# Altium PCB AES50.PcbDoc
Units mm, origin at the board's own origin, x right, y up, seen from the top; angles counter-clockwise.
Board outline 52.07 x 142.24 mm, 2 copper layers (Top Layer, Bottom Layer); 56 components, 83 nets, 278 pads, 88 vias.
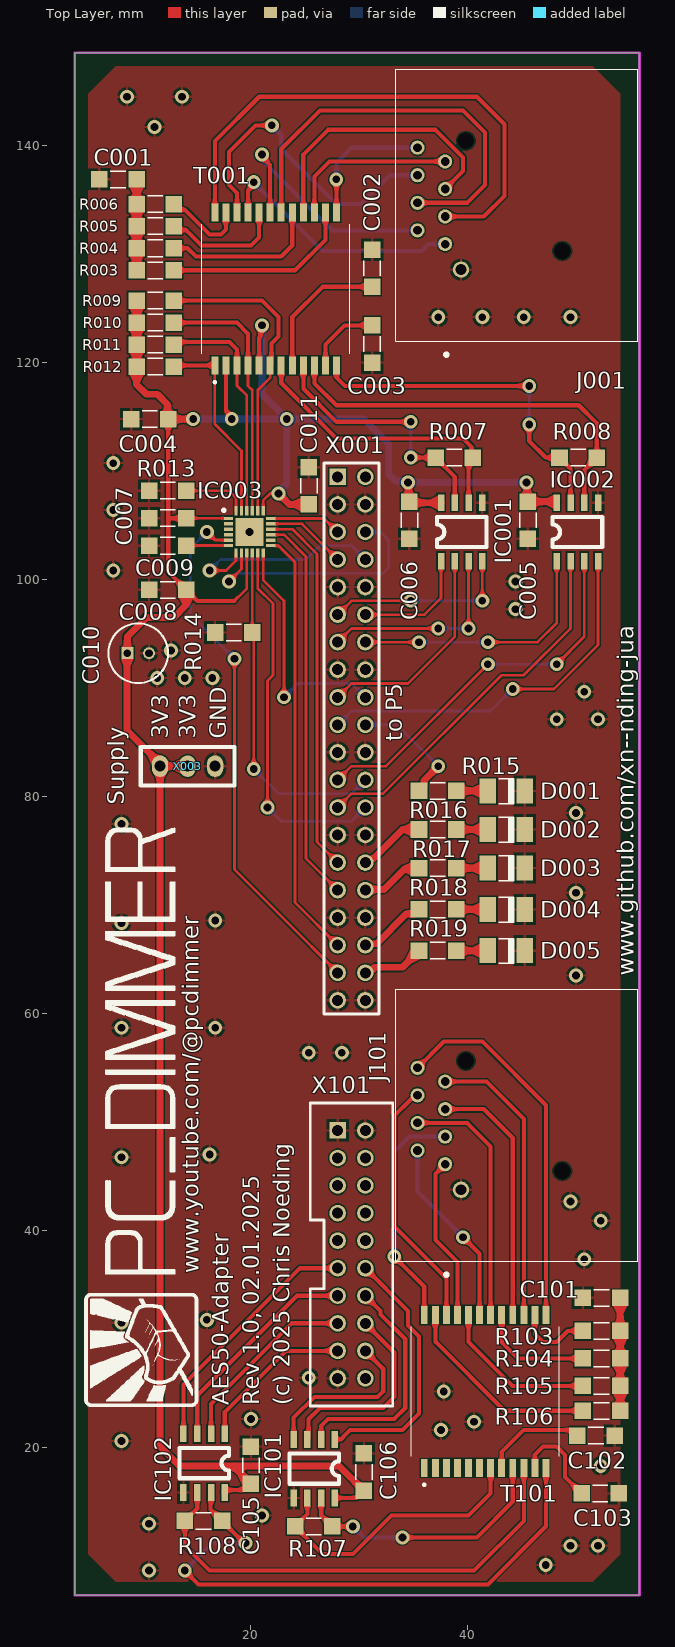
[diagram p0: Top Layer view]
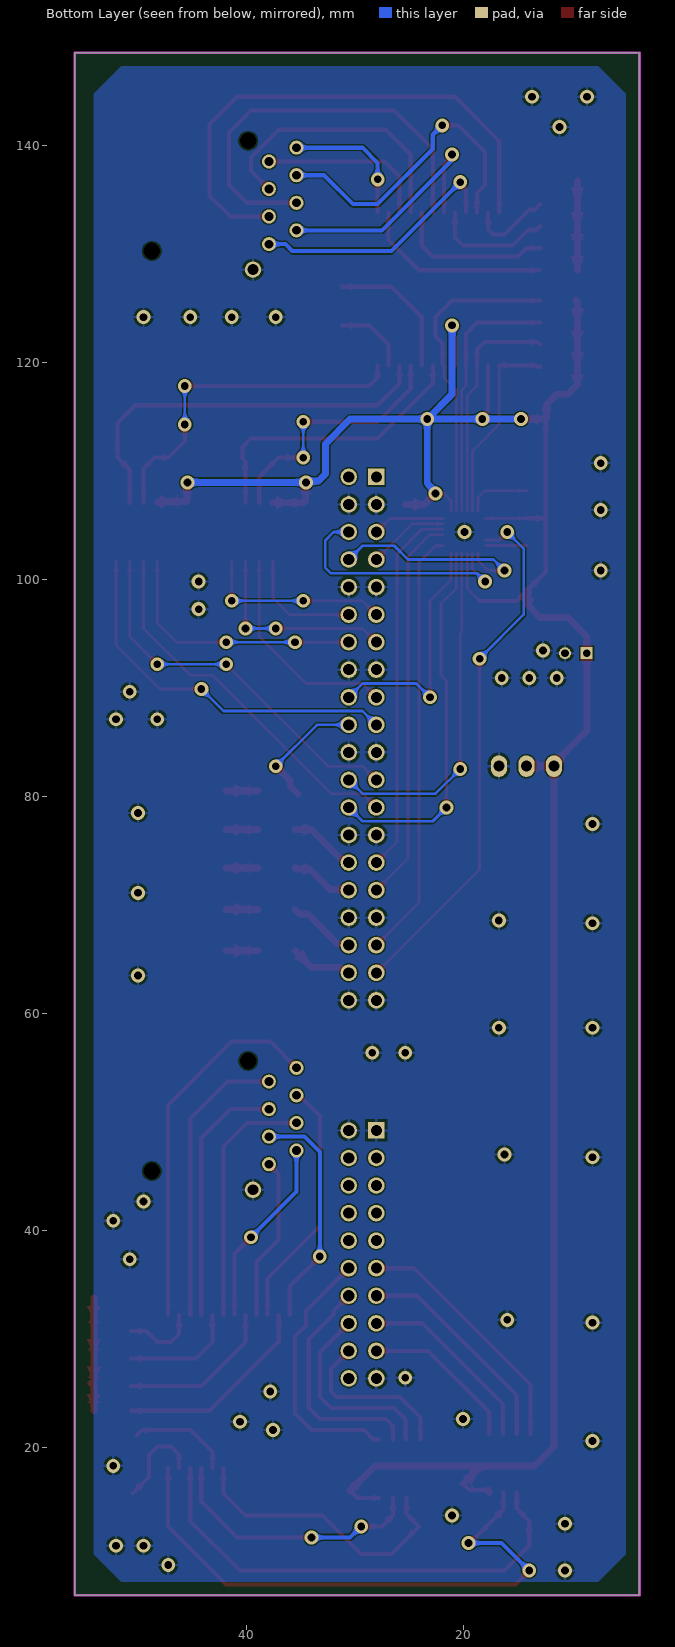
[diagram p1: Bottom Layer view, seen from below]

## Layer stack, top to bottom
Top Solder: solder mask 0.0102, Solder Resist, Dk 3.5
Top Layer: signal copper 0.0356
Dielectric 1: dielectric 0.32, FR-4, Dk 4.8
Bottom Layer: signal copper 0.0356
Bottom Solder: solder mask 0.0102, Solder Resist, Dk 3.5

## Board outline
3.81,6.35 3.81,148.59 55.88,148.59 55.88,6.35

## Design rules (kind name [scope] priority, off if disabled: settings)
Clearance [All] p1: gap=0.127 ignorepadtopadclearanceinfootprint=FALSE
PolygonConnect [All] p1: connectstyle=Relief reliefconductorwidth=0.254 reliefentries=4 polygonreliefangle="90 Angle" airgapwidth=0.254
RoutingVias [All] p1: holewidth=0.711 width=1.27 viastyle="Through Hole" minholewidth=0.711 minwidth=1.27 maxholewidth=0.711 maxwidth=1.27
SolderMaskExpansion [All] p1: expansion=0.102 istentingtop=FALSE
SupplyNets "Schematic Supply Nets_1" [InNet('GND')] p1: voltage=0.000
SupplyNets "Schematic Supply Nets" [InNet('3V3')] p2: voltage=0.000
Width [All] p1: maxlimit=1.27 minlimit=0.254 preferedwidth=0.254 minimp=50.000000 maximp=50.000000 favimp=50.000000
30 further rules are at their usual default settings.

## Classes and differential pairs
component class AES50B: C101 C102 C103 C105 C106 IC101 IC102 J101 R103 R104 R105 R106 R107 R108 T101 X101
component class AES50: C001 C002 C003 C004 C005 C006 C007 C008 C009 C010 C011 D001 D002 D003 D004 D005 IC001 IC002 IC003 J001 R003 R004 R005 R006 R007 R008 R009 R010 R011 R012 R013 R014 R015 R016 R017 R018 R019 T001 X001 X003

## Components (designator, comment, footprint, x,y, rotation, side; value= is the part's Value field where it differs from the comment)
C001 "1nF" 1206 9.525,136.906 r180 top
C002 "100nF" 1206 31.242,127 r90 top
C003 "100nF" 1206 31.242,123.444 r270 top
C004 "100nF" 1206 12.446,114.808 r180 top
C005 "100nF" 1206 45.593,107.188 r270 top
C006 "100nF" 1206 34.671,107.188 r270 top
C007 "100nF" 1206 14.097,105.664 r180 top
C008 "100nF" 1206 14.097,99.06 r180 top
C009 "1uF" 1206 14.097,103.124 r180 top
C010 "47µF/16V" CAPPRD200W50D550H1250 8.668,93.218 r0 top
C011 "100nF" 1206 25.4,106.934 r90 top
C101 "1nF" 1206 54.102,33.782 r180 top
C102 "100nF" 1206 50.165,21.082 r0 top
C103 "100nF" 1206 50.546,15.748 r0 top
C105 "100nF" 1206 20.066,16.637 r90 top
C106 "100nF" 1206 30.48,16.002 r90 top
D001 "LED 3MM" "LED 3MM" 45.31,82.018 r0 top
D002 "LED 3MM" "LED 3MM" 45.31,78.462 r0 top
D003 "LED 3MM" "LED 3MM" 45.31,74.906 r0 top
D004 "LED 3MM" "LED 3MM" 45.31,71.096 r0 top
D005 "LED 3MM" "LED 3MM" 45.31,67.286 r0 top
IC001 "65MLVD204" SOIC-8 39.497,104.394 r0 top
IC002 "65MLVD204" SOIC-8 50.165,104.394 r0 top
IC003 "LAN8720A" QFN50P400X400X100-25N-D 19.939,104.394 r0 top
IC101 "65MLVD204" SOIC-8 25.908,18.034 r180 top
IC102 "65MLVD204" SOIC-8 15.748,18.542 r180 top
J001 "NE8FAH-C5" NE8FAHC5 37.968,130.937 r270 top
J101 "NE8FAH-C5" NE8FAHC5 37.968,46.101 r270 top
R003 "75R" 1206 9.525,128.524 r0 top
R004 "75R" 1206 9.525,130.556 r0 top
R005 "75R" 1206 9.525,132.588 r0 top
R006 "75R" 1206 9.525,134.62 r0 top
R007 "100R" 1206 40.513,111.252 r180 top
R008 "100R" 1206 51.943,111.252 r180 top
R009 "49R9" 1206 12.954,125.73 r180 top
R010 "49R9" 1206 12.954,123.698 r180 top
R011 "49R9" 1206 12.954,121.666 r180 top
R012 "49R9" 1206 12.954,119.634 r180 top
R013 "12k1" 1206 10.668,108.204 r0 top
R014 "10k" 1206 16.76,95.127 r0 top
R015 "470R" 1206 38.989,80.518 r180 top
R016 "470R" 1206 38.989,76.962 r180 top
R017 "470R" 1206 38.989,73.406 r180 top
R018 "470R" 1206 38.989,69.596 r180 top
R019 "470R" 1206 38.989,65.786 r180 top
R103 "75R" 1206 54.102,30.734 r180 top
R104 "75R" 1206 54.102,28.194 r180 top
R105 "75R" 1206 54.102,25.654 r180 top
R106 "75R" 1206 54.102,23.368 r180 top
R107 "100R" 1206 24.13,12.7 r0 top
R108 "100R" 1206 13.97,13.208 r0 top
T001 "H2006ANLT" H2006ANLT 22.346,126.808 r0 top
T101 "H2006ANLT" H2006ANLT 41.656,25.146 r0 top
X001 "DIP40" DIP40 28.067,109.474 r0 top
X003 "1x3 Jumper" "1x3 Jumper" 14.224,82.804 r0 top
X101 "Steckerleiste_2x10" steckerleiste_2x10 30.607,49.214 r270 top

## Footprints (in the part's own frame and the unit in brackets; to place one, negate y for a bottom-side part, rotate by r counter-clockwise, add the part's x,y. Pads: shape width x height; smd on the part's side, far side on the other; paste and mask are expansions set on the pad)
"1x3 Jumper" [mm]
  oval 1.5x2 hole 1: 1(-2.54,0) 2(0,0) 3(2.54,0)
  silkscreen extent -4.32,-1.78 4.32,1.78
1206 [mil] "Standard 1206 Device"
  rect 60x60 smd: 1(0,0) 2(135,0)
  silkscreen extent 40,-30 95,30, body extent -15,-25 155,25, height 39
CAPPRD200W50D550H1250 [mm]
  rect 1.1x1.1 hole 0.7: 1(0,0)
  round 1.1 hole 0.7: 2(2,0)
  silkscreen extent -1.75,-2.75 3.75,2.75, body extent -1.74,-2.75 3.75,2.75, height 12.5
DIP40 [mil]
  rect 60x60 hole 40: 1(0,0)
  round 60 hole 40: 2(100,0) 3(0,-100) 4(100,-100) 5(0,-200) 6(100,-200) 7(0,-300) 8(100,-300) 9(0,-400) 10(100,-400) 11(0,-500) 12(100,-500) 13(0,-600) 14(100,-600) 15(0,-700) 16(100,-700) 17(0,-800) 18(100,-800) 19(0,-900) 20(100,-900) 21(0,-1000) 22(100,-1000) 23(0,-1100) 24(100,-1100) 25(0,-1200) 26(100,-1200) 27(0,-1300) 28(100,-1300) 29(0,-1400) 30(100,-1400) 31(0,-1500) 32(100,-1500) 33(0,-1600) 34(100,-1600) 35(0,-1700) 36(100,-1700) 37(0,-1800) 38(100,-1800) 39(0,-1900) 40(100,-1900)
  silkscreen extent -50,-1950 150,50
H2006ANLT [mm]
  rect 0.64x1.65 smd: 1(-5.61,-7.05) 2(-4.59,-7.05) 3(-3.57,-7.05) 4(-2.55,-7.05) 5(-1.53,-7.05) 6(-0.51,-7.05) 7(0.51,-7.05) 8(1.53,-7.05) 9(2.55,-7.05) 10(3.57,-7.05) 11(4.59,-7.05) 12(5.61,-7.05) 13(5.61,7.05) 14(4.59,7.05) 15(3.57,7.05) 16(2.55,7.05) 17(1.53,7.05) 18(0.51,7.05) 19(-0.51,7.05) 20(-1.53,7.05) 21(-2.55,7.05) 22(-3.57,7.05) 23(-4.59,7.05) 24(-5.61,7.05)
  silkscreen extent -6.82,-8.7 6.82,5.97
"LED 3MM" [mm]
  rect 1.524x2.3 smd: 1(-3.4,-1.5) 2(0,-1.5)
  silkscreen extent -2.41,-2.67 -1.02,-0.38, body extent -3.81,-2.54 0.51,-0.51, height 1
NE8FAHC5 [mm]
  round 1.3 hole 0.8: 1(0,0) 2(-1.27,-2.54) 3(-2.54,0) 4(-3.81,-2.54) 5(-5.08,0) 6(-6.35,-2.54) 7(-7.62,0) 8(-8.89,-2.54)
  round 1.5 hole 1: G1(2.355,1.47)
  round 0.775 hole 1.55 unplated: MH1(-9.525,1.91) MH2(0.635,10.8)
  silkscreen extent -16.13,-4.54 10.34,17.78, body extent -17.06,-5.64 8.03,21.51, height 31.21
QFN50P400X400X100-25N-D [mm]
  rect 0.85x0.3 smd: 1(-1.95,1.25) 2(-1.95,0.75) 3(-1.95,0.25) 4(-1.95,-0.25) 5(-1.95,-0.75) 6(-1.95,-1.25) 13(1.95,-1.25) 14(1.95,-0.75) 15(1.95,-0.25) 16(1.95,0.25) 17(1.95,0.75) 18(1.95,1.25)
  rect 0.3x0.85 smd: 7(-1.25,-1.95) 8(-0.75,-1.95) 9(-0.25,-1.95) 10(0.25,-1.95) 11(0.75,-1.95) 12(1.25,-1.95) 19(1.25,1.95) 20(0.75,1.95) 21(0.25,1.95) 22(-0.25,1.95) 23(-0.75,1.95) 24(-1.25,1.95)
  rect 2.6x2.6 smd: 25(0,0)
  silkscreen extent -2.5,1.88 -2.25,2.12, body extent -2.05,-2.05 2.05,2.05, height 1
SOIC-8 [mm]
  rect 0.6x1.55 smd: 1(-1.905,-2.7) 2(-0.635,-2.7) 3(0.635,-2.7) 4(1.905,-2.7) 5(1.905,2.7) 6(0.635,2.7) 7(-0.635,2.7) 8(-1.905,2.7)
  silkscreen extent -2.29,-1.4 2.29,1.4, body extent -2.45,-3.03 2.45,2.97, height 1.75
steckerleiste_2x10 [mil]
  rect 60x60 hole 40: 1(0,-100)
  round 60 hole 40: 2(0,0) 3(100,-100) 4(100,0) 5(200,-100) 6(200,0) 7(300,-100) 8(300,0) 9(400,-100) 10(400,0) 11(500,-100) 12(500,0) 13(600,-100) 14(600,0) 15(700,-100) 16(700,0) 17(800,-100) 18(800,0) 19(900,-100) 20(900,0)
  silkscreen extent -100,-200 1000,100, body extent -100,-200 1000,100, height 394

## Part data
C001 C002 C003 C004 C005 C006 C007 C008 C009 C011 C101 C102 C103 C105 C106: library part 1206_C_1nF/63V, "1206_C", Text Field1=06-23225
C010: library part MAL214256479E3, "Capacitor Polarised", Manufacturer_Name=Vishay, Datasheet Link=https://www.vishay.com/docs/28402/142rhs.pdf, Height=12.5mm, Manufacturer_Part_Number=MAL214256479E3
IC003: "Integrated Circuit", Manufacturer_Name=Microchip, Datasheet Link=http://ww1.microchip.com/downloads/en/DeviceDoc/8720a.pdf, Height=1mm, Manufacturer_Part_Number=LAN8720A
J001 J101: "Connector", Manufacturer_Name=Neutrik, Mouser Part Number=568-NE8FAH-C5, Datasheet Link=https://www.neutrik.com/media/10049/download/ne8fah-c5-1.pdf?v=1, Height=28.7mm, Manufacturer_Part_Number=NE8FAH-C5, Mouser Price/Stock=https://www.mouser.co.uk/ProductDetail/Neutrik/NE8FAH-C5?qs=yAJ577jGV73mSHthIeMdNw%3D%3D
R003 R004 R005 R006 R007 R008 R009 R010 R011 R012 R013 R014 R015 R016 R017 R018 R019 R103 R104 R105 R106 R107 R108: library part 1206_R, "1206_R"
T001 T101: "Transformer", Manufacturer_Name="Pulse Electronics", Mouser Part Number=673-H2006ANLT, Arrow Part Number=H2006ANLT, Arrow Price/Stock=https://www.arrow.com/en/products/h2006anlt/pulse-electronics-corporation?region=nac, Datasheet Link=https://componentsearchengine.com/Datasheets/1/H2006ANLT.pdf, Height=6.22mm, Manufacturer_Part_Number=H2006ANLT, Mouser Price/Stock=https://www.mouser.co.uk/ProductDetail/Pulse-Electronics/H2006ANLT?qs=4b8myOmUP%252Bsybzhc9Gv5ow%3D%3D

## Via types
v1: diameter 1.27, hole 0.711, Top Layer to Bottom Layer, 88 vias

## Nets (pads, with @x,y where several pads share a name; then routed paths per layer and width w, separated by ;. In a path a pad name is that pad's centre, name@x,y a point inside that pad or via, vN(x,y) a via of type N, cw(c..) or ccw(c..) an arc to the next point about the centre after c; other vN are vias at no path point)
3V3: C004.1 C005.1 C006.1 C007.1 C008.1 C010.1 C011.1 C105.1 C106.1 IC001.8 IC002.8 IC003.1 IC003.9 IC003.19 IC101.8 IC102.8 R009.2 R010.2 R011.2 R012.2 T001.2 T001.5 X003.1 X003.2 | length 237.9
  Top Layer w0.254: R009.2 R009.2@9.652,125.73 ; C007.1 17.969,105.664 IC003.1 ; 18.542,98.044 19.689,99.191 19.689,102.43 19.703,102.444 IC003.9 ; IC003.19 21.189,107.295 21.844,107.95 v1(22.606,107.95) ; C006.1 C006.1@34.765,107.094 ; IC002.8@48.087,107.188 48.1,107.175 IC002.8@48.1,107.094
  Top Layer w0.381: C004.1 12.446,105.41 ; C007.1 12.7,105.664 12.446,105.41 ; IC102.8@17.671,16.002 17.734,16.066 19.494,16.066 C105.1 ; T001.2 17.756,115.581 18.288,115.049 v1(18.288,114.808) ; 18.542,98.044 15.113,98.044 C008.1 12.446,100.711 12.446,105.41 ; T001.5 20.816,119.876 20.828,119.888 20.822,119.894 20.822,122.301 20.949,122.428 20.949,123.311 v1(21.082,123.444) ; IC101.8 29.812,15.334 C106.1
  Top Layer w0.635: R009.2@9.652,125.73 9.525,125.603 R010.2 R011.2 R012.2 9.525,117.983 10.414,117.094 11.43,117.094 12.373,116.151 12.373,114.881 C004.1 v1(14.732,114.808) ; C008.1 14.097,97.663 12.954,96.52 10.414,96.52 8.668,94.774 C010.1 8.636,93.186 8.636,86.102 11.684,83.054 X003.1 ; X003.2 X003.1 ; IC102.8 17.653,15.984 IC102.8@17.671,16.002 ; C105.1 18.415,18.288 ; v1(22.606,107.95) 23.622,106.934 C011.1 ; C106.1 28.194,18.288 18.415,18.288 ; v1(34.544,108.966) 34.608,108.902 34.608,107.251 C006.1 ; C006.1@34.765,107.094 IC001.8 ; v1(45.466,108.966) 45.529,108.902 45.529,107.251 C005.1 IC002.8@48.087,107.188 ; IC002.8@48.1,107.094 IC002.8 ; X003.1 11.684,20.066 13.462,18.288 18.415,18.288
  Bottom Layer w0.635: v1(14.732,114.808) v1(23.368,114.808) ; v1(21.082,123.444) 21.082,117.094 v1(23.368,114.808) ; v1(22.606,107.95) 22.606,108.122 23.368,108.884 v1(23.368,114.808) ; v1(45.466,108.966) v1(34.544,108.966) 34.422,109.088 33.406,109.088 32.766,109.728 32.766,112.522 30.48,114.808 v1(23.368,114.808)
CARX: IC001.1 X001.12 | length 11
  Top Layer w0.254: X001.12 36.068,96.774 37.592,98.298 IC001.1
CARX_B: IC101.1 X101.12 | length 24.2
  Top Layer w0.381: IC101.1 28.385,20.734 28.608,20.957 28.608,20.988 29.21,21.59 34.036,21.59 35.56,23.114 35.56,30.226 34.544,31.242 34.544,32.577 X101.12
CARXENn: IC001.2 X001.17 | length 20.1
  Top Layer w0.254: X001.17 29.337,90.424 34.544,90.424 38.862,94.742 IC001.2
CARXENn_B: IC101.2 X101.14 | length 21.5
  Top Layer w0.381: IC101.2 26.543,21.971 27.178,22.606 33.274,22.606 34.29,23.622 34.29,29.972 32.004,32.258 32.004,32.577 X101.14
CATX: IC001.4 X001.11 | length 17.5
  Top Layer w0.254: X001.11 29.337,98.044 v1(34.798,98.044) ; v1(41.402,98.044) IC001.4
  Bottom Layer w0.254: v1(34.798,98.044) v1(41.402,98.044)
CATX_B: IC101.4 X101.18 | length 15.7
  Top Layer w0.381: IC101.4 24.003,22.733 25.908,24.638 31.75,24.638 32.258,25.146 32.258,27.243 X101.18
CATXEN: IC001.3 X001.13 | length 18.8
  Top Layer w0.254: X001.13 29.337,95.504 v1(37.338,95.504) ; v1(40.132,95.504) IC001.3
  Bottom Layer w0.254: v1(37.338,95.504) v1(40.132,95.504)
CATXEN_B: IC101.3 X101.16 | length 18.5
  Top Layer w0.381: IC101.3 25.382,20.843 25.382,22.588 26.416,23.622 32.258,23.622 33.274,24.638 33.274,28.767 X101.16
CBRX: IC002.1 X001.14 | length 24.1
  Top Layer w0.254: X001.14 v1(35.56,94.234) ; v1(41.91,94.234) 46.482,94.234 48.26,96.012 IC002.1
  Bottom Layer w0.254: v1(35.56,94.234) v1(41.91,94.234)
CBRX_B: IC102.1 X101.17 | length 14.8
  Top Layer w0.381: IC102.1 17.653,23.241 23.306,28.894 X101.17
CBRXENn: IC002.2 X001.25 | length 34.5
  Top Layer w0.254: X001.25 29.337,80.264 32.258,80.264 43.18,91.186 45.212,91.186 49.53,95.504 IC002.2@49.53,101.6 ; IC002.2@49.436,101.6 IC002.2
CBRXENn_B: IC102.2 X101.15 | length 17.5
  Top Layer w0.381: IC102.2 16.383,24.003 23.814,31.434 X101.15
CBTX: IC002.4 X001.19 | length 34.8
  Top Layer w0.254: v1(44.196,89.916) 48.006,89.916 52.07,93.98 IC002.4
  Bottom Layer w0.254: X001.19 29.337,87.884 42.164,87.884 v1(44.196,89.916)
CBTX_B: IC102.4 X101.11 | length 23.2
  Top Layer w0.381: IC102.4 13.843,25.781 24.576,36.514 X101.11
CBTXEN: IC002.3 X001.23 | length 35.2
  Top Layer w0.254: X001.23 29.337,82.804 32.512,82.804 v1(41.91,92.202) ; v1(48.26,92.202) 50.8,94.742 IC002.3
  Bottom Layer w0.254: v1(41.91,92.202) v1(48.26,92.202)
CBTXEN_B: IC102.3 X101.13 | length 20.3
  Top Layer w0.381: IC102.3 15.113,24.765 24.322,33.974 X101.13
GND: C001.2 C002.2 C003.2 C004.2 C005.2 C006.2 C007.2 C008.2 C009.2 C010.2 C011.2 C101.2 C102.2 C103.2 C105.2 C106.2 D001.2 D002.2 D003.2 D004.2 D005.2 IC001.5 IC002.5 IC003.25 IC101.5 IC102.5 J001.G1 J101.G1 R013.1 R014.1 X001.3 X001.4 X001.9 X001.10 X001.15 X001.16 X001.21 X001.22 X001.27 X001.28 X001.33 X001.34 X001.39 X001.40 X003.3 X101.1 X101.2 X101.19 | length 0.1
  Top Layer w0.635: X101.1@28.067,49.149 X101.1
  other v1: 10.668,8.636 47.244,9.144 49.53,10.922 52.07,10.922 10.668,12.954 21.082,13.716 52.324,18.288 8.128,20.574 37.592,21.59 40.64,22.352 20.066,22.606 37.846,25.146 25.4,26.416 8.128,31.496 16.002,31.75 50.8,37.338 52.324,40.894 49.53,42.672 8.128,46.736 16.256,46.99 25.4,56.388 28.448,56.388 8.128,58.674 16.764,58.674 50.038,63.5 8.128,68.326 16.764,68.58 50.038,71.12 8.128,77.47 50.038,78.486 48.26,87.122 52.07,87.122 50.8,89.662 11.43,90.932 13.97,90.932 16.51,90.932 12.7,93.472 44.45,97.282 44.45,99.822 7.366,100.838 19.939,104.394 7.366,106.426 7.366,110.744 37.338,124.206 41.402,124.206 45.212,124.206 49.53,124.206 11.176,141.732 8.636,144.526 13.716,144.526
NetC001_1: C001.1 R003.1 R004.1 R005.1 R006.1 | length 8.4
  Top Layer w0.254: C001.1@9.525,136.779 C001.1
  Top Layer w0.635: R003.1 C001.1@9.525,136.779
NetC002_1: C002.1 T001.8 | length 13
  Top Layer w0.381: T001.8 23.876,124.206 26.67,127 C002.1
NetC003_1: C003.1 T001.11 | length 7
  Top Layer w0.381: T001.11 26.936,121.678 28.702,123.444 C003.1
NetC009_1: C009.1 IC003.6 | length 3.9
  Top Layer w0.254: C009.1 14.224,103.124 14.244,103.144 IC003.6
NetC101_1: C101.1 R103.1 R104.1 R105.1 R106.1 | length 10.7
  Top Layer w0.635: R106.1 R105.1 54.356,25.908 54.292,25.908 54.102,26.098 R104.1 R103.1 C101.1
NetC102_1: C102.1 T101.8 | length 9.6
  Top Layer w0.381: T101.8@43.186,18.04 T101.8 43.186,19.564 45.212,21.59 49.657,21.59 C102.1
NetC103_1: C103.1 T101.11 | length 8.8
  Top Layer w0.381: T101.11 46.246,19.322 46.99,20.066 48.26,20.066 49.022,19.304 49.022,17.272 C103.1
NetD001_1: D001.1 R015.1 | length 2.9
  Top Layer w0.635: R015.1 D001.1
NetD002_1: D002.1 R016.1 | length 2.9
  Top Layer w0.635: R016.1 D002.1
NetD003_1: D003.1 R017.1 | length 2.9
  Top Layer w0.635: R017.1 D003.1
NetD004_1: D004.1 R018.1 | length 2.9
  Top Layer w0.635: R018.1 D004.1
NetD005_1: D005.1 R019.1 | length 2.9
  Top Layer w0.635: R019.1 D005.1
NetIC001_6: IC001.6 R007.1 T001.7 | length 27
  Top Layer w0.381: T001.7 22.856,118.114 27.94,113.03 39.624,113.03 40.408,112.246 40.408,111.357 R007.1 40.132,110.871 IC001.6
NetIC001_7: IC001.7 R007.2 T001.9 | length 23.8
  Top Layer w0.381: T001.9 24.896,117.598 27.94,114.554 v1(34.798,114.554) ; v1(34.798,111.252) R007.2 38.862,109.474 IC001.7
  Bottom Layer w0.254: v1(34.798,111.252) v1(34.798,114.554)
NetIC002_6: IC002.6 R008.1 T001.10 | length 37
  Top Layer w0.381: T001.10 25.916,118.102 27.94,116.078 50.292,116.078 51.943,114.427 R008.1 50.8,110.109 IC002.6
NetIC002_7: IC002.7 R008.2 T001.12 | length 32.3
  Top Layer w0.381: T001.12 27.956,118.629 28.729,117.856 v1(45.72,117.856) ; v1(45.72,114.3) 45.72,112.776 47.244,111.252 R008.2 49.53,110.236 IC002.7
  Bottom Layer w0.254: v1(45.72,114.3) v1(45.72,117.856)
NetIC003_20: IC003.20 R009.1 T001.6 | length 28.9
  Top Layer w0.254: IC003.20 20.689,117.463 21.836,118.61 T001.6 T001.6@21.966,119.887
  Top Layer w0.381: R009.1 21.082,125.73 22.606,124.206 22.606,122.428 21.966,121.788 T001.6@21.966,119.887
NetIC003_21: IC003.21 R010.1 T001.4 | length 23.8
  Top Layer w0.254: T001.4 19.796,117.872 20.189,117.479 IC003.21
  Top Layer w0.381: R010.1 18.764,123.698 19.796,122.666 T001.4
NetIC003_22: IC003.22 R011.1 T001.3 | length 21.5
  Top Layer w0.254: T001.3 18.776,117.876 19.689,116.963 IC003.22
  Top Layer w0.381: R011.1 13.208,121.92 18.077,121.92 18.776,121.221 T001.3
NetIC003_23: IC003.23 R012.1 T001.1 | length 18.3
  Top Layer w0.254: T001.1 16.736,114.328 19.189,111.875 IC003.23
  Top Layer w0.381: R012.1 13.208,119.634 13.332,119.758 T001.1
NetIC003_24: IC003.24 R013.2 | length 6.1
  Top Layer w0.254: R013.2 18.034,108.204 18.689,107.549 IC003.24
NetIC101_6: IC101.6 R107.1 T101.7 | length 26.9
  Top Layer w0.381: IC101.6 25.273,13.843 R107.1 26.67,10.16 29.464,10.16 33.02,13.716 40.132,13.716 42.166,15.75 T101.7 T101.7@42.166,18.036
NetIC101_7: IC101.7 R107.2 T101.9 | length 24.6
  Top Layer w0.381: IC101.7 26.543,13.716 R107.2 v1(29.464,12.7) ; v1(34.036,11.684) 40.894,11.684 44.206,14.996 T101.9
  Bottom Layer w0.381: v1(29.464,12.7) 30.48,11.684 v1(34.036,11.684)
NetIC102_6: IC102.6 R108.1 T101.10 | length 44.4
  Top Layer w0.381: IC102.6 15.146,15.842 15.113,15.809 15.113,14.351 R108.1 13.97,10.922 16.256,8.636 40.64,8.636 45.226,13.222 T101.10
NetIC102_7: IC102.7 R108.2 T101.12 | length 54.2
  Top Layer w0.381: v1(13.97,8.636) 15.24,7.366 41.91,7.366 47.266,12.722 T101.12 ; IC102.7 16.35,15.842 16.35,14.257 R108.2 19.431,11.176 v1(19.558,11.176)
  Bottom Layer w0.381: v1(13.97,8.636) 16.51,11.176 v1(19.558,11.176)
NetJ001_1: J001.1 T001.21 | length 23.6
  Top Layer w0.381: T001.21 19.804,133.866 19.804,135.895 20.32,136.411 v1(20.32,136.652)
  Bottom Layer w0.381: v1(20.32,136.652) 26.67,130.302 35.814,130.302 36.449,130.937 J001.1
NetJ001_2: J001.2 T001.19 | length 23.2
  Top Layer w0.381: v1(21.082,139.192) 21.082,138.994 21.836,138.24 T001.19
  Bottom Layer w0.381: v1(21.082,139.192) 21.252,139.022 21.252,138.514 27.559,132.207 J001.2
NetJ001_3: J001.3 T001.24 | length 48.9
  Top Layer w0.381: T001.24 16.736,134.084 16.736,140.434 20.828,144.526 40.894,144.526 43.434,141.986 43.434,135.382 41.529,133.477 37.973,133.477 37.968,133.472 J001.3
NetJ001_4: J001.4 T001.18 | length 38.9
  Top Layer w0.381: T001.18@22.985,133.987 T001.18 22.856,139.696 26.416,143.256 39.624,143.256 41.656,141.224 41.656,136.398 40.005,134.747 J001.4
NetJ001_5: J001.5 T001.16 | length 25.7
  Top Layer w0.381: T001.16 24.892,133.858 24.892,139.192 27.178,141.478 37.084,141.478 39.624,138.938 39.624,137.673 J001.5
NetJ001_6: J001.6 T001.22 | length 29.4
  Top Layer w0.381: T001.22 T001.22@18.776,134.236 ; T001.22@18.906,134.366 T001.22@18.776,134.236 ; v1(21.996,141.884) 20.472,141.884 18.034,139.446 18.034,136.398 18.776,135.656 T001.22@18.776,134.236
  Bottom Layer w0.381: v1(21.996,141.884) 21.996,141.834 22.046,141.834 22.86,141.02 22.86,139.7 27.94,134.62 30.226,134.62 32.893,137.287 J001.6
NetJ001_7: J001.7 T001.15 | length 15.9
  Top Layer w0.381: T001.15 25.916,137.168 27.305,138.557 J001.7
NetJ001_8: J001.8 T001.13 | length 12.7
  Top Layer w0.381: v1(27.94,136.906) 27.94,136.652 27.956,136.636 T001.13 27.94,133.858 T001.13@27.956,133.874
  Bottom Layer w0.381: v1(27.94,136.906) 27.94,138.43 29.337,139.827 J001.8
NetJ101_1: J101.1 T101.21 | length 15.1
  Top Layer w0.381: J101.1 37.084,45.217 37.084,39.116 39.106,37.094 T101.21
NetJ101_2: J101.2 T101.19 | length 17.7
  Top Layer w0.381: v1(39.624,39.37) 41.146,37.848 T101.19
  Bottom Layer w0.381: J101.2 35.428,43.566 39.37,39.624 39.37,39.37 v1(39.624,39.37)
NetJ101_3: J101.3 T101.24 | length 21.5
  Top Layer w0.381: v1(33.274,37.592) 36.046,34.82 T101.24
  Bottom Layer w0.381: v1(33.274,37.592) 33.274,47.244 34.671,48.641 J101.3
NetJ101_4: J101.4 T101.18 | length 23.2
  Top Layer w0.381: J101.4 40.005,49.911 42.166,47.75 T101.18
NetJ101_5: J101.5 T101.16 | length 23.7
  Top Layer w0.381: J101.5 41.529,51.181 44.206,48.504 T101.16
NetJ101_6: J101.6 T101.22 | length 23.3
  Top Layer w0.381: J101.6 35.179,52.451 34.821,52.093 33.274,50.546 33.274,40.386 38.086,35.574 T101.22
NetJ101_7: J101.7 T101.15 | length 26.8
  Top Layer w0.381: J101.7 41.783,53.721 45.226,50.278 T101.15
NetJ101_8: J101.8 T101.13 | length 34.6
  Top Layer w0.381: J101.8 37.841,57.404 41.402,57.404 47.266,51.54 T101.13
NetR003_2: R003.2 T001.14 | length 17.9
  Top Layer w0.254: R003.2 13.208,128.524 R003.2
  Top Layer w0.381: R003.2@13.208,128.524 13.462,128.524 24.13,128.524 26.936,131.33 T001.14
NetR004_2: R004.2 T001.17 | length 14.7
  Top Layer w0.381: R004.2 14.224,130.556 14.986,129.794 22.86,129.794 23.876,130.81 T001.17
NetR005_2: R005.2 T001.20 | length 11.2
  Top Layer w0.381: R005.2 13.302,132.24 14.064,132.24 15.494,130.81 20.066,130.81 20.816,131.56 T001.20
NetR006_2: R006.2 T001.23 | length 7.7
  Top Layer w0.381: R006.2 13.485,134.089 13.993,134.089 16.256,131.826 17.303,131.826 17.756,132.279 T001.23
NetR015_2: R015.2 X001.20 | length 11.7
  Top Layer w0.635: R015.2@35.267,80.225 R015.2 36.005,80.962 36.005,81.471 v1(37.338,82.804)
  Bottom Layer w0.254: X001.20 33.528,86.614 v1(37.338,82.804)
NetR016_2: R016.2 X001.30 | length 6.2
  Top Layer w0.635: X001.30 30.848,73.914 31.234,74.301 31.375,74.301 34.036,76.962 R016.2
NetR017_2: R017.2 X001.32 | length 5.8
  Top Layer w0.635: X001.32 30.734,71.374 30.797,71.438 32.322,71.438 34.217,73.333 35.487,73.333 R017.2
NetR018_2: R018.2 X001.36 | length 6.3
  Top Layer w0.635: X001.36 30.74,66.427 31.629,66.427 34.378,69.176 35.14,69.176 R018.2
NetR019_2: R019.2 X001.38 | length 6.1
  Top Layer w0.635: X001.38@30.734,63.627 X001.38 30.988,63.754 30.988,63.894 31.018,63.924 31.158,63.924 31.496,64.262 34.036,64.262 R019.2
NetR103_2: R103.2 T101.14 | length 6.9
  Top Layer w0.381: T101.14 46.246,30.462 46.99,29.718 48.26,29.718 49.276,30.734 R103.2
NetR104_2: R104.2 T101.17 | length 10.6
  Top Layer w0.381: T101.17 43.186,29.712 44.704,28.194 R104.2
NetR105_2: R105.2 T101.20 | length 14.7
  Top Layer w0.381: T101.20 40.126,29.724 44.196,25.654 R105.2
NetR106_2: R106.2 T101.23 | length 18.7
  Top Layer w0.381: T101.23 37.066,29.736 43.434,23.368 R106.2
PHYDV: IC003.11 X001.26 | length 34.5
  Top Layer w0.254: IC003.11 20.675,102.444 20.689,102.43 20.689,99.199 22.098,97.79 22.098,91.186 21.59,90.678 v1(21.59,78.994)
  Bottom Layer w0.254: v1(21.59,78.994) 21.844,78.994 21.844,78.74 22.86,77.724 29.337,77.724 X001.26
PHYERR: IC003.10 R014.2 X001.24 | length 31.7
  Top Layer w0.254: IC003.10 20.203,102.444 20.189,102.43 R014.2 20.32,94.996 v1(20.32,82.55)
  Bottom Layer w0.254: v1(20.32,82.55) 22.606,80.264 29.337,80.264 X001.24
PHYMDC: IC003.13 X001.35 | length 39.8
  Top Layer w0.254: IC003.13 21.912,103.121 22.609,103.121 24.13,101.6 24.13,70.231 X001.35
PHYMDIO: IC003.12 X001.18 | length 22.7
  Top Layer w0.254: IC003.12 21.189,102.385 21.212,102.362 21.189,102.339 21.189,99.969 23.114,98.044 v1(23.114,89.154)
  Bottom Layer w0.254: v1(23.114,89.154) 24.384,90.424 29.337,90.424 X001.18
PHYRCLK: IC003.5 X001.37 | length 49.2
  Top Layer w0.254: v1(16.002,104.394) 16.752,103.644 IC003.5 ; IC003.5@18.006,103.644 IC003.5 ; IC003.5@18.022,103.644 IC003.5 ; v1(18.542,92.71) 18.542,73.279 23.114,68.707 X001.37
  Bottom Layer w0.254: v1(16.002,104.394) 14.478,102.87 14.478,96.774 v1(18.542,92.71)
PHYRSTn: IC003.15 X001.31 | length 36
  Top Layer w0.254: IC003.15 23.11,104.144 25.146,102.108 25.146,74.295 X001.31
PHYRXD0: IC003.8 X001.6 | length 23.4
  Top Layer w0.254: v1(18.034,99.822) 19.189,100.977 IC003.8
  Bottom Layer w0.254: v1(18.034,99.822) 18.796,100.584 32.258,100.584 32.766,101.092 32.766,103.632 32.004,104.394 X001.6
PHYRXD1: IC003.7 X001.8 | length 19.3
  Top Layer w0.254: v1(16.256,100.838) 17.78,100.838 18.689,101.747 IC003.7
  Bottom Layer w0.254: v1(16.256,100.838) 17.272,101.854 25.146,101.854 26.416,103.124 29.337,103.124 X001.8
PHYTXD0: IC003.17 X001.7 | length 7.5
  Top Layer w0.254: IC003.17 24.777,105.144 X001.7
PHYTXD1: IC003.18 X001.5 | length 6.7
  Top Layer w0.254: IC003.18 26.817,105.644 X001.5
PHYTXEN: IC003.16 X001.29 | length 34.5
  Top Layer w0.254: IC003.16 23.88,104.644 26.162,102.362 26.162,75.819 X001.29
pads on no net: IC003.2 IC003.3 IC003.4 IC003.14 J001.MH1 J001.MH2 J101.MH1 J101.MH2 T101.1 T101.2 T101.3 T101.4 T101.5 T101.6 X001.1 X001.2 X101.3 X101.4 X101.5 X101.6 X101.7 X101.8 X101.9 X101.10 X101.20

## Polygon pours and split planes (outlines as drawn)
GND on Bottom Layer "GND" (solid, remove dead copper, pour order 0): 5.08,10.16 7.62,7.62 51.562,7.62 54.102,10.16 54.102,144.78 51.562,147.32 7.62,147.32 5.08,144.78
GND on Top Layer "GND" (solid, remove dead copper, pour order 2): 5.08,10.16 7.62,7.62 51.562,7.62 54.102,10.16 54.102,144.78 51.562,147.32 7.62,147.32 5.08,144.78

## Keep-outs
Keep-Out Layer:
  lines w0.254: 3.81,148.59 3.81,72.898 3.81,6.35 55.88,6.35 55.88,148.59 43.116,148.59 17.081,148.59 4.064,148.59

## Silkscreen, mask and mechanical layers (free items; w line width, h text height)
Top Overlay:
  drawing of 16 lines, arcs and shapes, not listed
  text "3V3" at 12.446,85.344 h1.52 r90
  text "3V3" at 14.986,85.344 h1.52 r90
  text "GND" at 17.78,85.344 h1.52 r90
  text "to P5" at 34.036,85.09 h1.52 r90
  text "Supply" at 8.382,79.248 h1.52 r90
  text "www.github.com/xn--nding-jua" at 55.372,63.5 h1.52 r90
  text "www.youtube.com/@pcdimmer" at 15.24,36.068 h1.52 r90
  text "AES50-Adapter" at 18.034,23.876 h1.52 r90
  text "Rev 1.0, 02.01.2025" at 20.828,23.876 h1.52 r90
  text "(c) 2025 Chris Noeding" at 23.622,23.876 h1.52 r90